# Altium PCB NucciF.PcbDoc (part 1 of 3)
Units mm, origin at the board's own origin, x right, y up, seen from the top; angles counter-clockwise.
Board outline 88.1 x 36.1 mm, 4 copper layers (Top Layer, inner 1, inner 2, Bottom Layer), stack 1.588 mm thick; 144 components, 118 nets, 519 pads, 140 vias.
Unrouted connection lines stored in the file: 6.
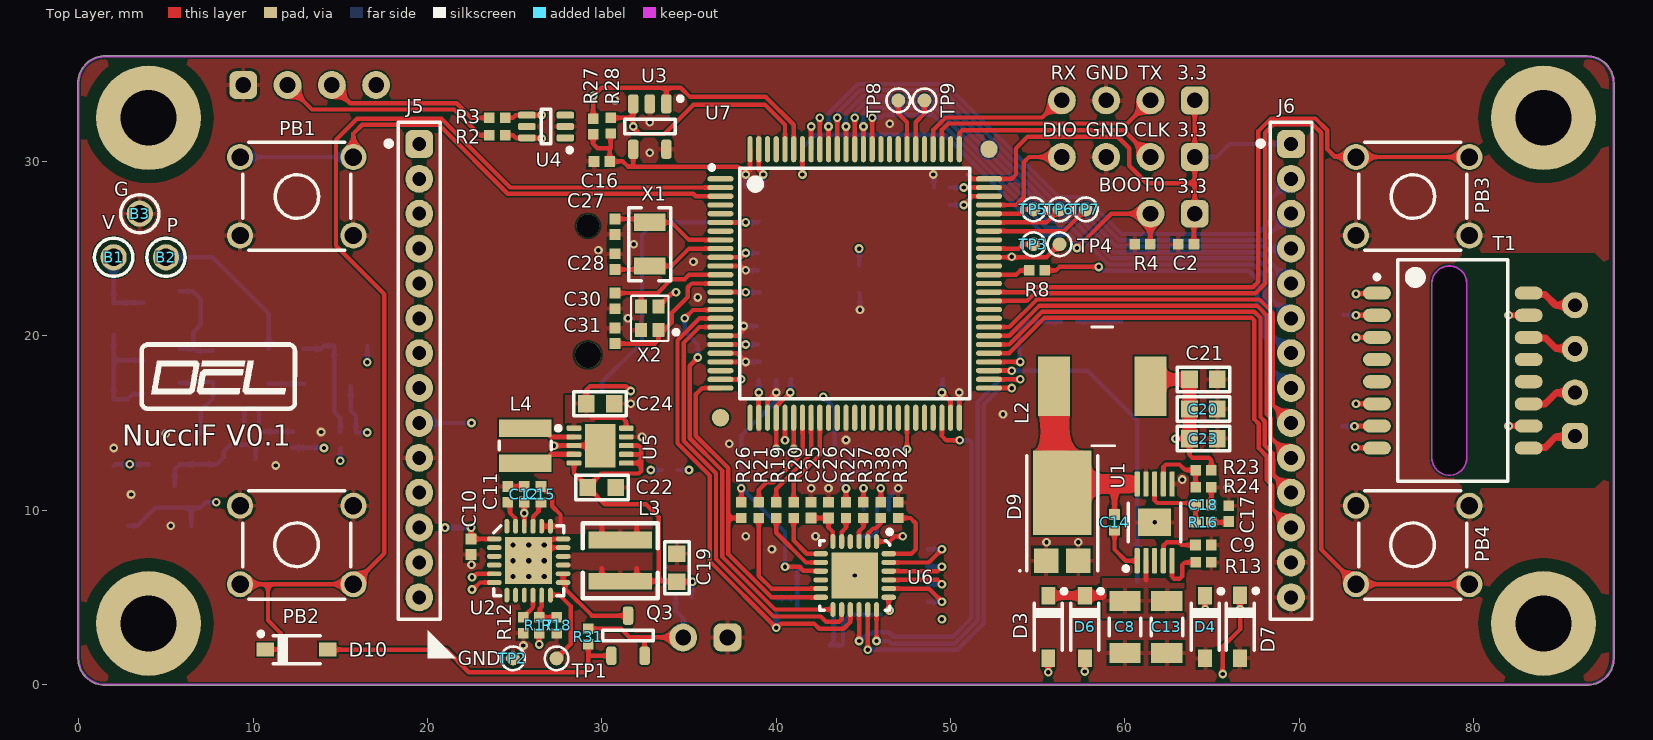
[diagram p0: Top Layer view]
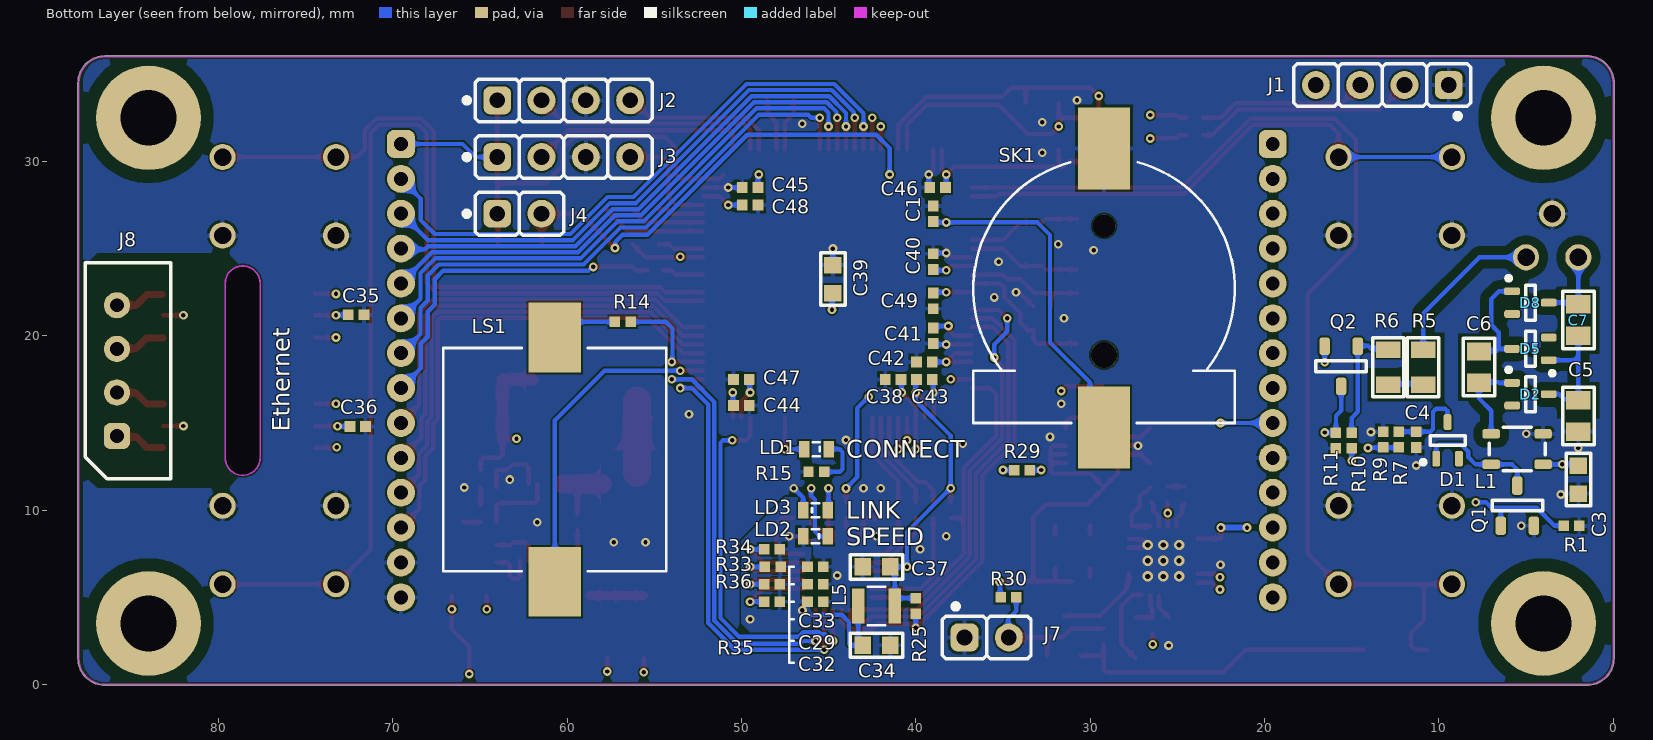
[diagram p1: Bottom Layer view, seen from below]
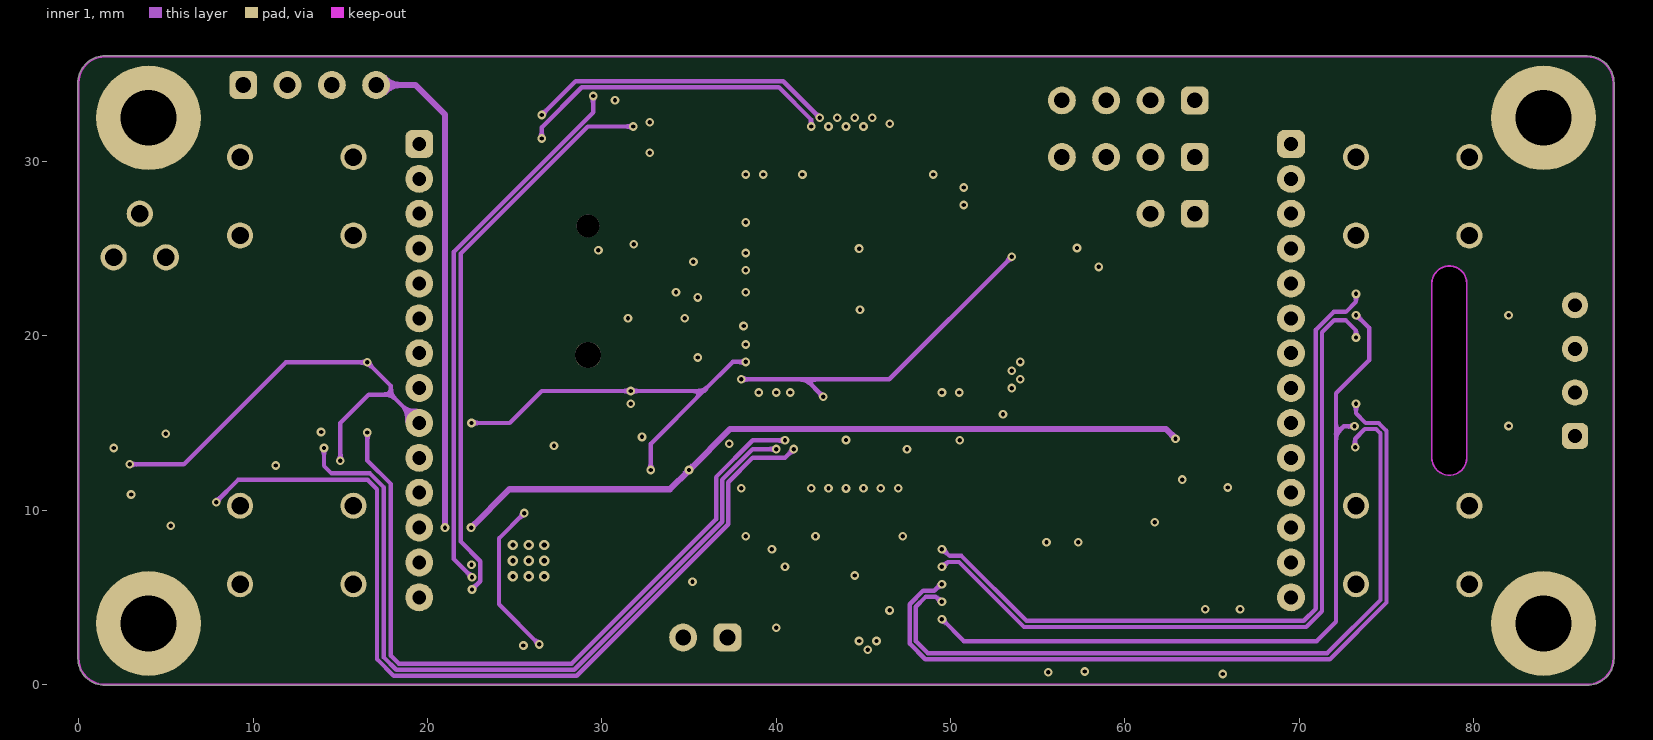
[diagram p2: inner 1]
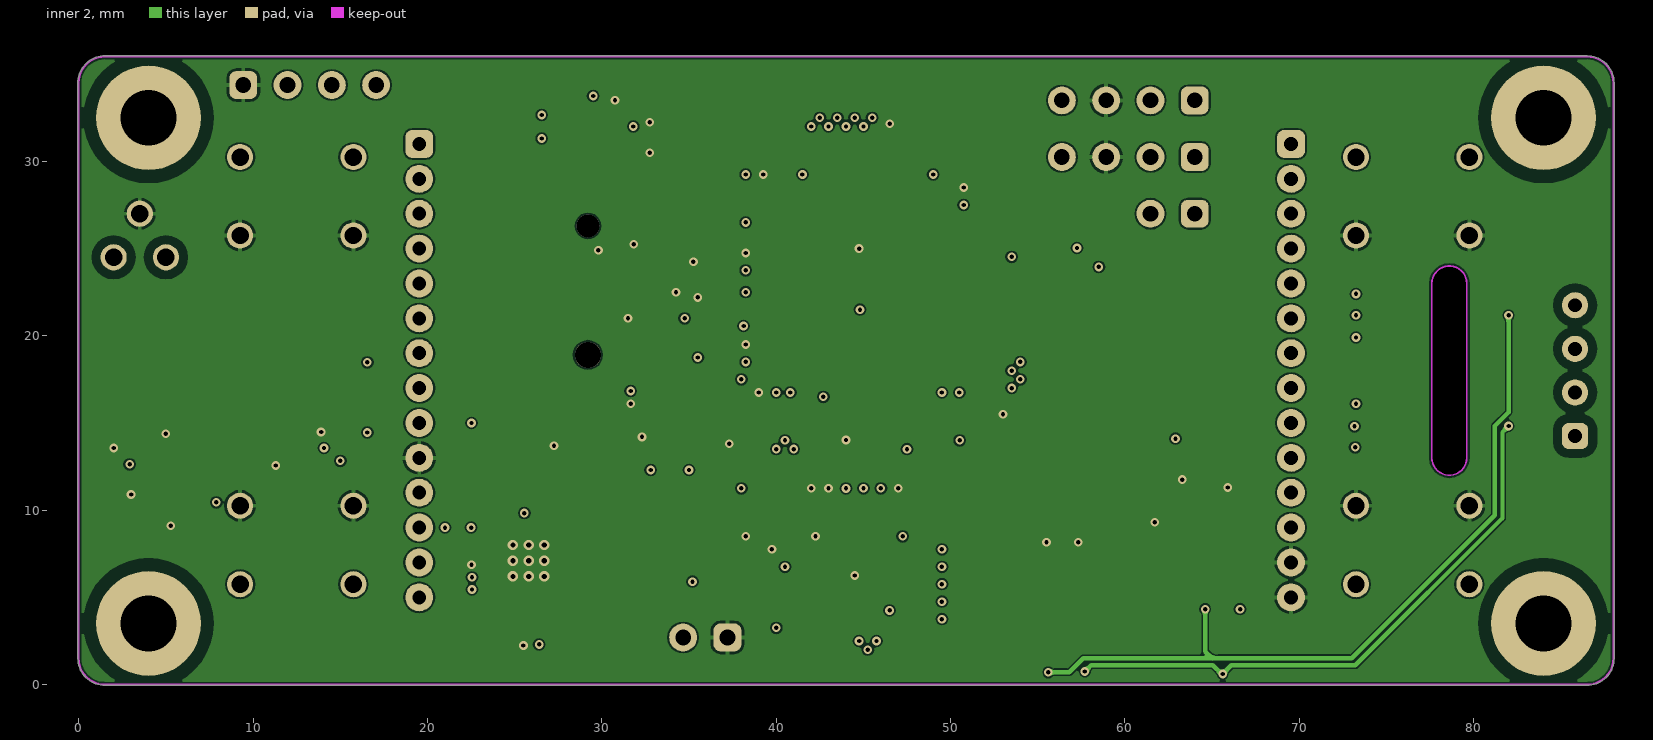
[diagram p3: inner 2]
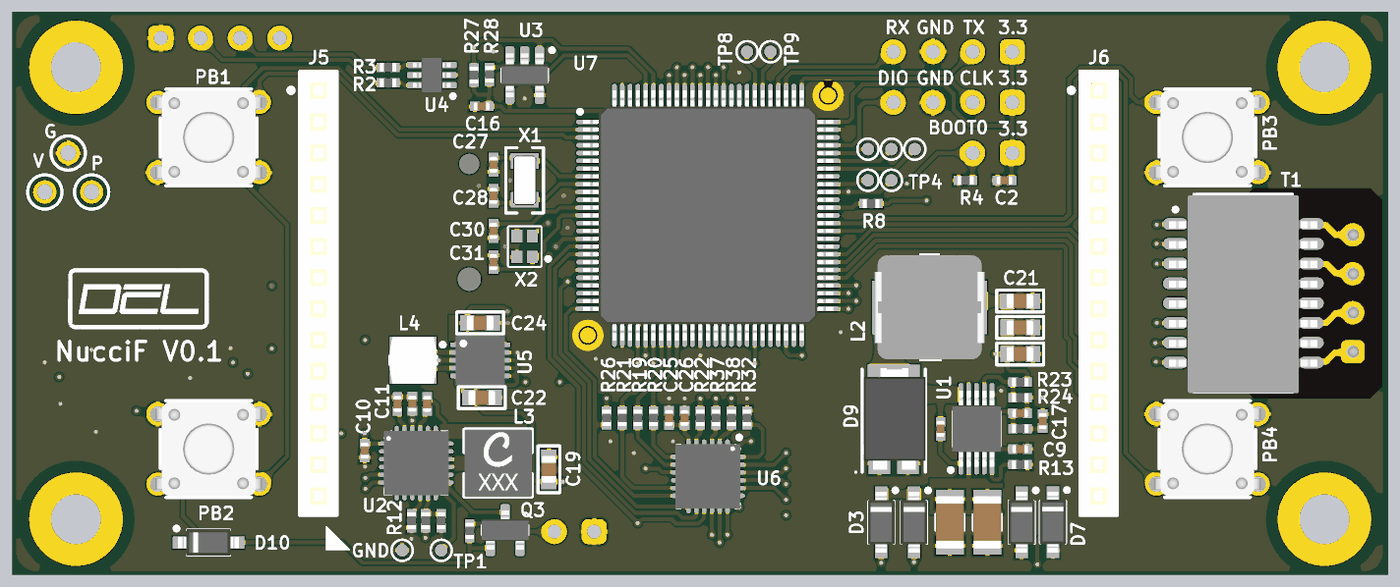
[diagram p5: 3D render of the assembled board from above, using the file's embedded part models]
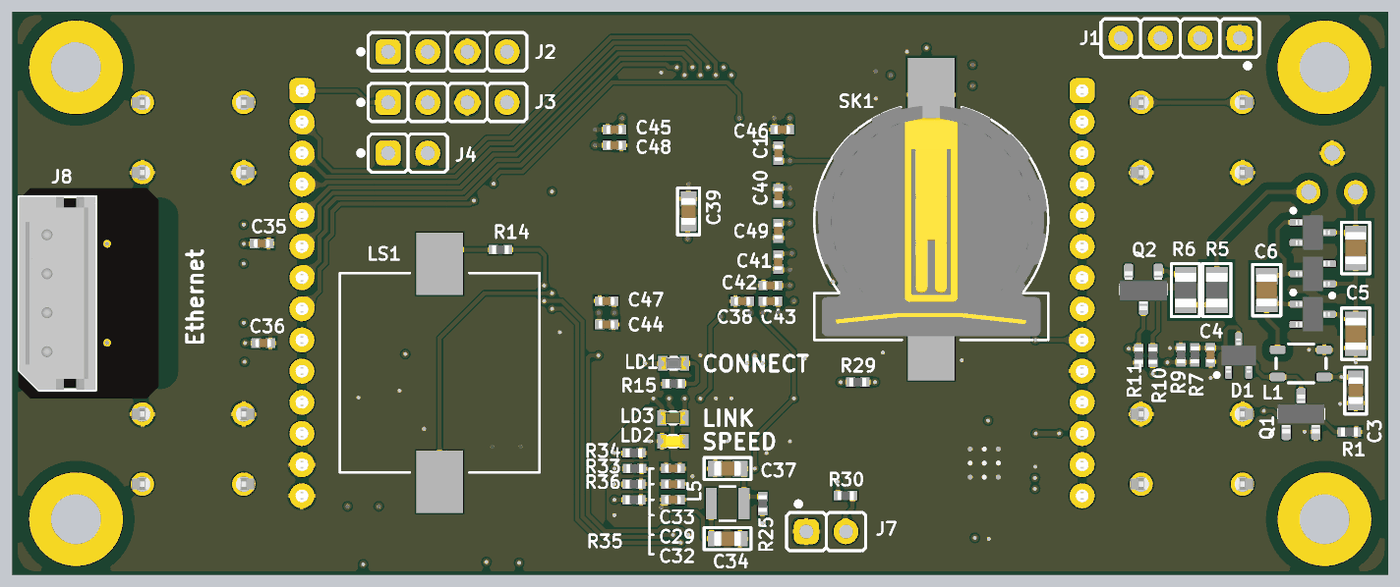
[diagram p6: 3D render of the assembled board from below, using the file's embedded part models]

## Layer stack, top to bottom
Top Solder: solder mask 0.01, Solder Resist, Dk 3.5
Top Layer: signal copper 0.036
Dielectric 2: prepreg 0.2104, 7628, Dk 4.4
inner 1: signal copper 0.0152
Dielectric 1: dielectric 1.065, FR-4, Dk 4.6
inner 2: signal copper 0.0152
Dielectric 3: prepreg 0.2104, 7628, Dk 4.4
Bottom Layer: signal copper 0.036
Bottom Solder: solder mask 0.01, Solder Resist, Dk 3.5

## Board outline
-0.05,1.499 cw(c0.198,1.5) -0.05,1.5 -0.05,34.499 cw(c0.001,34.5) -0.05,34.5 cw(c1.501,34.5) -0.05,34.503 -0.05,34.6 cw(c0,34.6) -0.046,34.621 cw(c1.5,34.5) 1.5,36.05 cw(c1.5,36.022) 1.501,36.05 86.5,36.05 cw(c86.5,34.5) 88.05,34.501 cw(c88.003,34.5) 88.05,34.5 88.05,1.5 cw(c88.037,1.5) 88.05,1.499 ccw(c87.663,1.5) 88.05,1.5 88.05,1.499 cw(c86.5,1.5) 86.5,-0.05 1.5,-0.05 cw(c1.5,1.5)
cut-out: 77.6,13 ccw(c78.6,13) 79.6,13 79.6,23 ccw(c78.6,23) 77.6,23

## Design rules (kind name [scope] priority, off if disabled: settings)
Clearance Clearance_HV [InNetClass('HV')] p1: gap=0.5 ignorepadtopadclearanceinfootprint=FALSE
Clearance Clearance_DIFF100_HV [InNetClass('DIFF100_HV') vs not InNetClass('DIFF100_HV')] p2: gap=0.5 ignorepadtopadclearanceinfootprint=FALSE
Clearance Clearance_MHKeepOut [(ObjectKind = 'Pad') And (AsMM(PadXSize_AllLayers) = 6) vs OnLayer('Keep-Out Layer')] p3: gap=0.2 ignorepadtopadclearanceinfootprint=FALSE except(0: Arc-Hole Track-Hole SMDPad-Hole THPad-Hole Via-Hole Fill-Hole Poly-Hole Region-Hole Text-Hole)
Clearance Clearance_MH [(ObjectKind = 'Pad') And (AsMM(PadXSize_AllLayers) = 6)] p4: gap=0.75 ignorepadtopadclearanceinfootprint=FALSE except(0: Arc-Hole Track-Hole SMDPad-Hole THPad-Hole Via-Hole Fill-Hole Poly-Hole Region-Hole Text-Hole)
Clearance [All] p5: gap=0.1 ignorepadtopadclearanceinfootprint=FALSE
DiffPairsRouting DiffPair_DIFF100DiffPairsRouting [InDifferentialPairClass('DIFF100') or InDifferentialPairClass('DIFF100_HV')] p1: maxlimit=0.3 minlimit=0.2 mostfreqgap=0.25 midlayer1_maxgap=0.2 midlayer1_prefgap=0.2 midlayer1_minwidth=0.158 midlayer1_maxwidth=0.158 midlayer1_prefwidth=0.158 midlayer2_maxgap=0.2 midlayer2_prefgap=0.2 midlayer2_minwidth=0.158 midlayer2_maxwidth=0.158 midlayer2_prefwidth=0.158 impedanceprofiledriven=TRUE impedanceprofileid={F871FC90-6CB0-4843-A030-AEDCB11ECAEF} impedanceprofilevalue=100.000000 maxuncoupledlength=12
Height [All] p1: minheight=0 maxheight=30 prefheight=12.7
HoleSize [All] p1: absolutevalues=TRUE maxlimit=4 minlimit=0.2 maxpercent=80.000 minpercent=20.000
HoleToHoleClearance [All] p1: gap=0.2 allowstackedmicrovias=TRUE
MinimumSolderMaskSliver [All] p1: minsoldermaskwidth=0.1
PolygonConnect [All] p1: thpad.connectstyle=Relief thpad.reliefconductorwidth=0.25 thpad.reliefentries=4 thpad.polygonreliefangle="90 Angle" thpad.airgapwidth=0.15 smdpad.connectstyle=Relief smdpad.reliefconductorwidth=0.25 smdpad.reliefentries=4 smdpad.polygonreliefangle="90 Angle" smdpad.airgapwidth=0.15 via.connectstyle=Direct via.reliefconductorwidth=0.25 via.reliefentries=4 via.polygonreliefangle="90 Angle" via.airgapwidth=0.15
RoutingCorners [All] p1: cornerstyle=45-Degree minsetback=2 maxsetback=2
RoutingVias [All] p1: holewidth=0.5 width=1 viastyle="Through Hole" minholewidth=0.25 minwidth=0.5 maxholewidth=0.5 maxwidth=1
SilkToSilkClearance [All] p1: silktosilkclearance=0
SilkToSolderMaskClearance [IsPad] p1: minsilkscreentomaskgap=0.1 clearancetoexposedcopper=TRUE
SolderMaskExpansion [All] p1: expansion=0.05 istentingtop=FALSE
Width DiffPair_DIFF100Width [InDifferentialPairClass('DIFF100') or InDifferentialPairClass('DIFF100_HV')] p1: maxlimit=0.254 minlimit=0.25 preferedwidth=0.254 toplayer_maxwidth=0.25 toplayer_prefwidth=0.25 midlayer1_minwidth=0.254 midlayer2_minwidth=0.254 bottomlayer_maxwidth=0.25 bottomlayer_prefwidth=0.25 minimp=50.000000 maximp=50.000000 favimp=100.000000
Width [All] p2: maxlimit=3 minlimit=0.2 preferedwidth=0.25
22 further rules are at their usual default settings.

## Classes and differential pairs
net class HV: 400V NetC5_2 NetC6_1 NetC6_2 NetR5_2 PULSE
net class DIFF100: RD_N RD_P TD_N TD_P
net class DIFF100_HV: RX_N RX_P TX_N TX_P
differential pair TD: +TD_P -TD_N
differential pair RD: +RD_P -RD_N
differential pair RX: +RX_P -RX_N
differential pair TX: +TX_P -TX_N

## Components (designator, comment, footprint, x,y, rotation, side; value= is the part's Value field where it differs from the comment)
B1 "V" c150h100 2,24.5 r0 top
B2 "P" c150h100 5,24.5 r0 top
B3 "G" c150h100 3.5,27 r0 top
C1 "100n" CAPC1005X55N 39,27 r270 bottom
C2 "100n" CAPC1005X55N 63.5,25.25 r0 top
C3 "10u" CAPC1608X87N 2,11.75 r90 bottom
C4 "100n" CAPC1005X55N 11.3,14.05 r90 bottom
C5 "22n" CAPC2012X135N 2,15.4 r90 bottom
C6 "22n" CAPC2012X135N 7.7,18.2 r90 bottom
C7 "22n" CAPC2012X135N 2,20.9 r90 bottom
C8 "2.2u" CAPC3216X140N 60,3.3 r270 top
C9 "10n" CAPC1005X55N 64.5,8 r180 top
C10 "4.7u" CAPC1005X55N 22.5,7.9 r90 top
C11 "4.7u" CAPC1005X55N 24.6,10.9 r270 top
C12 "4.7u" CAPC1005X55N 25.55,10.91 r270 top
C13 "2.2u" CAPC3216X140N 62.4,3.3 r270 top
C14 "100n" CAPC1005X55N 59.4,9.3 r90 top
C15 "100n" CAPC1005X55N 26.5,10.9 r90 top
C16 "100n" CAPC1005X55N 30,30 r0 top
C17 "4.7n" CAPC1005X55N 65.95,9.8 r270 top
C18 "33p" CAPC1005X55N 64.5,10.3 r180 top
C19 "10u" CAPC1608X87N 34.3,6.7 r270 top
C20 "10u" CAPC1608X87N 64.5,15.8 r0 top
C21 "10u" CAPC1608X87N 64.5,17.5 r0 top
C22 "10u" CAPC1608X87N 30,11.3 r180 top
C23 "10u" CAPC1608X87N 64.5,14.1 r0 top
C24 "10u" CAPC1608X87N 29.9,16.1 r180 top
C25 "470p" CAPC1005X55N 42,10 r270 top
C26 "2.2u" CAPC1005X55N 43,10 r270 top
C27 "15p" CAPC1005X55N 30.75,26.25 r90 top
C28 "15p" CAPC1005X55N 30.75,24.25 r270 top
C29 "22n" CAPC1005X55N 45.75,5.75 r180 bottom
C30 "6.8p" CAPC1005X55N 30.75,22 r90 top
C31 "6.8p" CAPC1005X55N 30.75,20 r270 top
C32 "100n" CAPC1005X55N 45.75,4.75 r0 bottom
C33 "100n" CAPC1005X55N 45.75,6.75 r0 bottom
C34 "4.7u" CAPC1608X87N 42.25,2.25 r0 bottom
C35 "22n" CAPC1005X55N 72.1,21.2 r180 bottom
C36 "22n" CAPC1005X55N 72,14.8 r180 bottom
C37 "4.7u" CAPC1608X87N 42.25,6.75 r180 bottom
C38 "100n" CAPC1005X55N 41.3,17.5 r180 bottom
C39 "10u" CAPC1608X87N 44.75,23.25 r90 bottom
C40 "100n" CAPC1005X55N 39,24.25 r270 bottom
C41 "100n" CAPC1005X55N 39,20 r90 bottom
C42 "100n" CAPC1005X55N 39.5,18.5 r180 bottom
C43 "100n" CAPC1005X55N 39.5,17.5 r0 bottom
C44 "100n" CAPC1005X55N 50,16 r0 bottom
C45 "100n" CAPC1005X55N 49.5,28.5 r180 bottom
C46 "100n" CAPC1005X55N 38.75,28.5 r180 bottom
C47 "2.2u" CAPC1005X55N 50,17.5 r180 bottom
C48 "2.2u" CAPC1005X55N 49.5,27.5 r0 bottom
C49 "100n" CAPC1005X55N 39,22 r90 bottom
D1 "1SS370" SOT65P210X100-3N 9.5,14 r90 bottom
D2 "1SS370" SOT65P210X100-3N 4.75,16.65 r180 bottom
D3 "MBR0540T1G" SOD3716X135N 55.6,3.3 r270 top
D4 "MBR0540T1G" SOD3716X135N 64.6,3.3 r270 top
D5 "1SS370" SOT65P210X100-3N 4.75,19.25 r0 bottom
D6 "MBR0540T1G" SOD3716X135N 57.7,3.3 r270 top
D7 "MBR0540T1G" SOD3716X135N 66.6,3.318 r270 top
D8 "1SS370" SOT65P210X100-3N 4.75,21.9 r180 bottom
D9 "SBRT15U100SP5" SBRT15U100SP5 56.4,9.823 r90 top
D10 "1N4148W" SOD3715X145N 12.489,2 r0 top
J1 "Header 4" 3M_2304-6111-TG 9.433,34.379 r0 bottom
J2 "Header 4" 3M_2304-6111-TG 64,33.5 r180 bottom
J3 "Header 4" 3M_2304-6111-TG 64,30.25 r180 bottom
J4 "Header 2" 3M_2302-6111-TG 64,27 r180 bottom
J5 "Socket 14" 3M_955114-6102-AR 19.5,18 r270 top
J6 "Socket 14" 3M_955114-6102-AR 69.5,18 r270 top
J7 "Header 2" 3M_2302-6111-TG 37.2,2.7 r180 bottom
J8 "SPOX" MOLEX_22-03-5045 85.879,18 r90 bottom
L1 "ATB322515" XFMR_ATB322515-0110-T000 5.5,13.5 r0 bottom value="Step-up Transformers"
L2 "15uH" IND_VISHAY_IHLP-2525CZ 58.7,17.1 r0 top
L3 "1uH" IND_COILCRAFT_XAL4020 31.05,7.1 r270 top
L4 "2.2uH" VLS3010CX-1 25.6,13.7 r90 top
L5 "2.2uH" INDC2520X100N 42.25,4.5 r180 bottom
LD1 "Blue" LEDC1608X80N_BLUE 45.7,13.5 r0 bottom
LD2 "Yellow" LEDC1608X80N_YELLOW 45.75,8.5 r0 bottom
LD3 "Green" LEDC1608X80N_GREEN 45.75,10 r180 bottom
LS1 "Piezo" HPS13C 60.7,12.9 r180 bottom
PB1 "Push Button" PB_E-SWITCH_TL1105HF100Q 12.5,28 r180 top
PB2 "Push Button" PB_E-SWITCH_TL1105HF100Q 12.5,8 r0 top
PB3 "Push Button" PB_E-SWITCH_TL1105HF100Q 76.5,28 r180 top
PB4 "Push Button" PB_E-SWITCH_TL1105HF100Q 76.5,8 r0 top
Q1 "IRLML0100TRPBF" SOT95P237X112-3N 5.5,10.256 r90 bottom
Q2 "BC857B" SOT95P230X110-3N 15.6,18.25 r270 bottom
Q3 "IRLML6401PBF" SOT95P237X112-3N 31.5,2.8 r90 top
R1 "100k" RESC1005X40N 2.4,9.1 r0 bottom
R2 "100" RESC1005X40N 24,31.5 r0 top
R3 "100" RESC1005X40N 24,32.5 r0 top
R4 "1k" RESC1005X40N 61,25.25 r180 top
R5 "0" RESC2012X60N 10.9,18.2 r270 bottom
R6 "100k" RESC2012X60N 12.9,18.2 r90 bottom
R7 "100k" RESC1005X40N 12.3,14.05 r270 bottom
R8 "100" RESC1005X40N 54.95,23.75 r180 top
R9 "7k5" RESC1005X40N 13.2,14.05 r270 bottom
R10 "1M" RESC1005X40N 15,14 r270 bottom
R11 "12k" RESC1005X40N 15.9,14 r90 bottom
R12 "680" RESC1005X40N 25.5,3.4 r90 top
R13 "270k" RESC1005X40N 64.5,7 r180 top
R14 "270" RESC1005X40N 56.8,20.8 r180 bottom
R15 "1k" RESC1005X40N 45.7,12.2 r0 bottom
R16 "20k" RESC1005X40N 64.5,9.3 r180 top
R17 "100k" RESC1005X40N 26.4,3.4 r270 top
R18 "100k" RESC1005X40N 27.4,3.4 r90 top
R19 "10" RESC1005X40N 40,10 r270 top
R20 "10" RESC1005X40N 41,10 r270 top
R21 "10" RESC1005X40N 39,10 r270 top
R22 "100" RESC1005X40N 44,10 r270 top
R23 "51k" RESC1005X40N 64.5,12.3 r0 top
R24 "10k" RESC1005X40N 64.5,11.3 r180 top
R25 "1k5" RESC1005X40N 40,4.5 r90 bottom
R26 "2k" RESC1005X40N 38,10 r90 top
R27 "2k" RESC1005X40N 29.5,32 r270 top
R28 "2k" RESC1005X40N 30.5,32.05 r270 top
R29 "0" RESC1005X40N 33.9,12.3 r180 bottom
R30 "0" RESC1005X40N 34.686,5.008 r180 bottom
R31 "100k" RESC1005X40N 29.225,2.749 r90 top
R32 "12k" RESC1005X40N 47,10 r90 top
R33 "49R9" RESC1005X40N 48.2,6.75 r180 bottom
R34 "49R9" RESC1005X40N 48.25,7.75 r180 bottom
R35 "49R9" RESC1005X40N 48.25,4.75 r180 bottom
R36 "49R9" RESC1005X40N 48.25,5.75 r180 bottom
R37 "4k7" RESC1005X40N 45,10 r90 top
R38 "270" RESC1005X40N 46,10 r90 top
SK1 "BH500" EEMB_BH500 29.2,23.5 r90 bottom
T1 "LF-H84P-1" XFMR_LF-H84P 78.8,18 r0 top
TP1 "Test Point" TP_SMD_800 27.4,1.5 r90 top
TP2 "GND" TP_SMD_800 24.9,1.5 r90 top
TP3 "Test Point" TP_SMD_800 54.75,25.25 r90 top
TP4 "Test Point" TP_SMD_800 56.25,25.25 r90 top
TP5 "Test Point" TP_SMD_800 54.75,27.25 r90 top
TP6 "Test Point" TP_SMD_800 56.25,27.25 r90 top
TP7 "Test Point" TP_SMD_800 57.75,27.25 r90 top
TP8 "Test Point" TP_SMD_800 47,33.5 r90 top
TP9 "Test Point" TP_SMD_800 48.5,33.5 r90 top
U1 "TPS54260" SOP50P490X110-11N-R157X188 61.7,9.3 r90 top
U2 "RT9466" QFN50P400X400X100-25N-S270 25.8,7.1 r0 top locked
U3 "24AA08" SOT95P280X145-5N 32.75,32 r270 top
U4 "NUP4202" SOT65P220X110-6N 26.8,32 r180 top
U5 "TPS63001" SON50P300X300X100-11N-R175X250 29.9,13.7 r0 top
U6 "LAN8720" QFN50P400X400X100-25N-S265 44.5,6.25 r270 top
U7 "STM32F407VGT6" QFP50P1600X1600X160-100N 44.5,23 r0 top
X1 "32.768KHZ" OSCCC150X320X80-2N 32.75,25.25 r90 top
X2 "24MHZ" OSCCC160X200X65-4N 32.75,21 r180 top

## Footprints (in the part's own frame and the unit in brackets; to place one, negate y for a bottom-side part, rotate by r counter-clockwise, add the part's x,y. Pads: shape width x height; smd on the part's side, far side on the other; paste and mask are expansions set on the pad)
3M_2302-6111-TG [mm] "4 Contacts Straight Strip Header Pitch 2.54mm L=5.8mm ''Mini-Wire-Wrap''"
  rrect50% 1.6x1.6 hole 0.9: 1(0,0)
  round 1.6 hole 0.9: 2(2.54,0)
  silkscreen extent -1.9,-1.23 3.81,1.23
3M_2304-6111-TG [mm] "4 Contacts Straight Strip Header Pitch 2.54mm L=5.8mm ''Mini-Wire-Wrap''"
  rrect50% 1.6x1.6 hole 0.9: 1(0,0)
  round 1.6 hole 0.9: 2(2.54,0) 3(5.08,0) 4(7.62,0)
  silkscreen extent -1.27,-1.23 8.89,1.93
3M_955114-6102-AR [mm] "2 mm Straight, Solder Tail"
  rrect50% 1.6x1.6 hole 0.8: 1(-13,0.025)
  round 1.6 hole 0.8: 2(-11,0.025) 3(-9,0.025) 4(-7,0.025) 5(-5,0.025) 6(-3,0.025) 7(-1,0.025) 8(1,0.025) 9(3,0.025) 10(5,0.025) 11(7,0.025) 12(9,0.025) 13(11,0.025) 14(13,0.025)
  silkscreen extent -14.25,-1.87 14.25,1.23, body extent -14.25,-1.18 14.25,1.23, height 4
c150h100 [mm] "Plated Through Hole: Hole Dia.=1mm Pad Dia.=1.5mm"
  round 1.5 hole 1: 1(0,0)
  silkscreen extent -1.1,-1.1 1.1,1.1
CAPC1005X55N [mm] "Chip Capacitor, Body 1.0x0.55mm, IPC Medium Density"
  rect 0.62x0.62 smd: 1(-0.45,0) 2(0.45,0)
  body extent -0.52,-0.27 0.53,0.28, height 0.55
CAPC1608X87N [mm] "Chip Capacitor, Body 1.6x0.8mm IPC Medium Density"
  rect 0.95x1 smd: 1(-0.8,0) 2(0.8,0)
  silkscreen extent -1.5,-0.7 1.5,0.7, body extent -0.87,-0.47 0.88,0.48, height 0.87
CAPC2012X135N [mm] "Chip Capacitor, Body 2.0x1.25mm, IPC Medium Density"
  rect 1.05x1.4 smd: 1(-0.9,0) 2(0.9,0)
  silkscreen extent -1.65,-0.9 1.65,0.9, body extent -1.05,-0.67 1.05,0.68, height 1.25
CAPC3216X140N [mm] "Chip Capacitor, Body 3.2x1.6mm, IPC Medium Density"
  rect 1.15x1.8 smd: 1(-1.5,0) 2(1.5,0)
  silkscreen extent -0.5,-0.9 0.5,0.9, body extent -1.7,-0.9 1.7,0.9, height 1.4
EEMB_BH500 [mm] "Battery holder for coin-type Lithium Battery  BH500(ForLIR/CR1216,1220,1225)"
  rect 4.7x3 smd: 1(-8.75,0) 2(7.25,0)
  round 1.3 hole 1.3 unplated: MH1(2.8,0)
  round 1.5 hole 1.5 unplated: MH2(-4.6,0)
  silkscreen extent -8.5,-7.5 6.44,7.5, body extent -10.9,-7.43 9.3,7.43, height 4
HPS13C [mm] "12.8 x 12.8 mm PIEZO SOUND GENERATORS"
  rect 3x4 smd: 1(0,-7) 2(0,7)
  silkscreen extent -6.4,-6.4 6.4,6.4, body extent -6.4,-8.4 6.4,8.4, height 2.5
IND_COILCRAFT_XAL4020 [mil] "Coilcraft High Temperature Shielded Power Inductors"
  rect 38x144 smd: 1(-46.5,0) 2(46.5,0)
  silkscreen extent -85,-85 85,85, body extent -85,-85 85,85, height 83
IND_VISHAY_IHLP-2525CZ [mm] "6.47 x 6.86 x 3 mm"
  rect 1.83x3.43 smd: 1(-2.77,0) 2(2.77,0)
  silkscreen extent -0.6,-3.4 0.7,3.4, body extent -3.54,-3.34 3.54,3.34, height 2.89
INDC2520X100N [mm] "Chip Inductor, EIA 1008, Metric 2520, 2.50mm L X 2mm W, IPC Medium Density"
  rect 0.7x2 smd: 1(-1.05,0) 2(1.05,0)
  silkscreen extent -0.5,-1.1 0.5,1.1, body extent -1.33,-1.07 1.33,1.07, height 1
LEDC1608X80N_BLUE [mm] "Chip BLUE LED, 2-Leads, Body 1.6x0.8mm, IPC Medium Density"
  rect 0.6x0.95 smd: 1(-0.7,0) 2(0.7,0)
  silkscreen extent -0.2,-0.4 0.2,0.4, body extent -0.8,-0.4 0.8,0.4, height 0.6
LEDC1608X80N_GREEN [mm] "Chip GREEN LED, 2-Leads, Body 1.6x0.8mm, IPC Medium Density"
  rect 0.6x0.95 smd: 1(-0.7,0) 2(0.7,0)
  silkscreen extent -0.2,-0.4 0.2,0.4, body extent -0.8,-0.4 0.8,0.4, height 0.6
LEDC1608X80N_YELLOW [mm] "Chip YELLOW LED, 2-Leads, Body 1.6x0.8mm, IPC Medium Density"
  rect 0.6x0.95 smd: 1(-0.7,0) 2(0.7,0)
  silkscreen extent -0.2,-0.4 0.2,0.4, body extent -0.8,-0.4 0.8,0.4, height 0.6
MOLEX_22-03-5045 [mm] "4.9 x 12.4 x 5.9, 2.50mm Pitch SPOX Wire-to-Board Header, Vertical, Shrouded, 4 Circuits, Tin (Sn) Plating"
  rrect50% 1.5x1.5 hole 0.8: 1(-3.75,-0.065)
  round 1.5 hole 0.8: 2(-1.25,-0.065) 3(1.25,-0.065) 4(3.75,-0.065)
  silkscreen extent -6.2,-3.15 6.2,1.75, body extent -6.2,-3.12 6.2,1.78, height 5.95
OSCCC150X320X80-2N [mm] "Oscillator, corner concave; 2 pin, 3.20mm L X 1.50mm W X 0.80mm H, IPC Medium Density"
  rect 1x1.8 smd: 1(-1.25,0) 2(1.25,0)
  silkscreen extent -2.1,-1.2 2.1,1.2, body extent -1.6,-0.75 1.6,0.75, height 0.71
OSCCC160X200X65-4N [mm] "Oscillator, corner concave; 4 pin, 2.00mm L X 1.60mm W X 0.65mm H, IPC Medium Density"
  rect 0.7x0.8 smd: 1(-0.5,0.675) 2(-0.5,-0.675) 3(0.5,-0.675) 4(0.5,0.675)
  silkscreen extent -1.63,-1.3 1.07,1.3, body extent -0.8,-1 0.8,1, height 0.65
PB_E-SWITCH_TL1105HF100Q [mm] "6x6mm Model, Horizontal, Flat Plunger Type (without Ground Terminal) Pushbutton Switch, OMRON B3F Series"
  round 1.5 hole 1: 1(-3.25,2.25) 2(3.25,2.25) 3(-3.25,-2.25) 4(3.25,-2.25)
  silkscreen extent -3.1,-3.1 3.1,3.1, body extent -3.95,-3 3.95,3, height 12.51
QFN50P400X400X100-25N-S265 [mm] "QFN,0.50mm pitch,square;6 pin X 6 pin,4.0mm X 4.0mm X 1.00mm H body (w/thermal tab 2.65 X 2.65mm),  IPC Medium Density"
  oval 0.85x0.3 smd: 1(-1.95,1.25) 2(-1.95,0.75) 3(-1.95,0.25) 4(-1.95,-0.25) 5(-1.95,-0.75) 6(-1.95,-1.25) 13(1.95,-1.25) 14(1.95,-0.75) 15(1.95,-0.25) 16(1.95,0.25) 17(1.95,0.75) 18(1.95,1.25)
  oval 0.3x0.85 smd: 7(-1.25,-1.95) 8(-0.75,-1.95) 9(-0.25,-1.95) 10(0.25,-1.95) 11(0.75,-1.95) 12(1.25,-1.95) 19(1.25,1.95) 20(0.75,1.95) 21(0.25,1.95) 22(-0.25,1.95) 23(-0.75,1.95) 24(-1.25,1.95)
  rect 2.65x2.65 smd: 25(0,0)
  silkscreen extent -2.62,-2 2,2.13, body extent -2.07,-2.07 2.08,2.08, height 1
QFN50P400X400X100-25N-S270 [mm] "QFN,0.50mm pitch,square;6 pin X 6 pin,4.0mm X 4.0mm X 1.00mm H body (w/thermal tab 2.7 X 2.7mm),  IPC Medium Density"
  oval 0.85x0.28 smd: 1(-1.975,1.25) 2(-1.975,0.75) 3(-1.975,0.25) 4(-1.975,-0.25) 5(-1.975,-0.75) 6(-1.975,-1.25) 13(1.975,-1.25) 14(1.975,-0.75) 15(1.975,-0.25) 16(1.975,0.25) 17(1.975,0.75) 18(1.975,1.25)
  oval 0.28x0.85 smd: 7(-1.25,-1.975) 8(-0.75,-1.975) 9(-0.25,-1.975) 10(0.25,-1.975) 11(0.75,-1.975) 12(1.25,-1.975) 19(1.25,1.975) 20(0.75,1.975) 21(0.25,1.975) 22(-0.25,1.975) 23(-0.75,1.975) 24(-1.25,1.975)
  rect 2.7x2.7 smd paste-3: 25(0,0)
  silkscreen extent -2,-2 2,2, body extent -2.07,-2.07 2.08,2.08, height 1
QFP50P1600X1600X160-100N [mm] "QFP, 0.50mm Pitch, Square; 100 Pin,14.00mm L X 14.00mm W X 1.60mm H Body, IPC Medium Density"
  oval 1.5x0.3 smd: 1(-7.7,6) 2(-7.7,5.5) 3(-7.7,5) 4(-7.7,4.5) 5(-7.7,4) 6(-7.7,3.5) 7(-7.7,3) 8(-7.7,2.5) 9(-7.7,2) 10(-7.7,1.5) 11(-7.7,1) 12(-7.7,0.5) 13(-7.7,0) 14(-7.7,-0.5) 15(-7.7,-1) 16(-7.7,-1.5) 17(-7.7,-2) 18(-7.7,-2.5) 19(-7.7,-3) 20(-7.7,-3.5) 21(-7.7,-4) 22(-7.7,-4.5) 23(-7.7,-5) 24(-7.7,-5.5) 25(-7.7,-6) 51(7.7,-6) 52(7.7,-5.5) 53(7.7,-5) 54(7.7,-4.5) 55(7.7,-4) 56(7.7,-3.5) 57(7.7,-3) 58(7.7,-2.5) 59(7.7,-2) 60(7.7,-1.5) 61(7.7,-1) 62(7.7,-0.5) 63(7.7,0) 64(7.7,0.5) 65(7.7,1) 66(7.7,1.5) 67(7.7,2) 68(7.7,2.5) 69(7.7,3) 70(7.7,3.5) 71(7.7,4) 72(7.7,4.5) 73(7.7,5) 74(7.7,5.5) 75(7.7,6)
  oval 0.3x1.5 smd: 26(-6,-7.7) 27(-5.5,-7.7) 28(-5,-7.7) 29(-4.5,-7.7) 30(-4,-7.7) 31(-3.5,-7.7) 32(-3,-7.7) 33(-2.5,-7.7) 34(-2,-7.7) 35(-1.5,-7.7) 36(-1,-7.7) 37(-0.5,-7.7) 38(0,-7.7) 39(0.5,-7.7) 40(1,-7.7) 41(1.5,-7.7) 42(2,-7.7) 43(2.5,-7.7) 44(3,-7.7) 45(3.5,-7.7) 46(4,-7.7) 47(4.5,-7.7) 48(5,-7.7) 49(5.5,-7.7) 50(6,-7.7) 76(6,7.7) 77(5.5,7.7) 78(5,7.7) 79(4.5,7.7) 80(4,7.7) 81(3.5,7.7) 82(3,7.7) 83(2.5,7.7) 84(2,7.7) 85(1.5,7.7) 86(1,7.7) 87(0.5,7.7) 88(0,7.7) 89(-0.5,7.7) 90(-1,7.7) 91(-1.5,7.7) 92(-2,7.7) 93(-2.5,7.7) 94(-3,7.7) 95(-3.5,7.7) 96(-4,7.7) 97(-4.5,7.7) 98(-5,7.7) 99(-5.5,7.7) 100(-6,7.7)
  round 1 smd paste-0.51 mask+0.5: FTG1(-7.7,-7.7) FTG2(7.7,7.7)
  silkscreen extent -8.32,-6.6 6.6,6.77, body extent -8.02,-8.02 8.02,8.02, height 1.6
RESC1005X40N [mm] "Chip Resistor, EIA 0402, Metric 1005, Body 1.0x0.5mm, IPC Medium Density"
  rect 0.6x0.6 smd: 1(-0.45,0) 2(0.45,0)
  body extent -0.52,-0.27 0.53,0.28, height 0.4
RESC2012X60N [mm] "Chip Resistor, EIA 0805, Metric 2012, Body 2.0x1.2mm, IPC Medium Density"
  rect 0.95x1.4 smd: 1(-1,0) 2(1,0)
  silkscreen extent -1.7,-0.9 1.7,0.9, body extent -1.1,-0.67 1.1,0.68, height 0.6
SBRT15U100SP5 [mm] "DFN, 3-Leads, Body 4.05x6.6mm"
  rect 1.4x1.39 smd: 1(-2.727,0.92) 2(-2.727,-0.92)
  rect 4.86x3.36 smd: 3(1.177,0)
  silkscreen extent -3.35,-2.02 3.3,2.47, body extent -3.14,-2.03 3.37,1.94, height 1.15
SOD3715X145N [mm] "SOD Diode (SOD-123); 2.70mm W X 1.55mm L X 1.45mm H body, IPC Medium Density"
  rect 1x0.8 smd: 1(-1.8,0) 2(1.8,0)
  silkscreen extent -2.17,-0.8 1.35,1.02, body extent -1.95,-0.85 1.95,0.85, height 1.45
SOD3716X135N [mm] "SOD Diode (SOD-123), 2.70mm W X 1.60mm L X 1.35mm H body, IPC Medium Density"
  rect 1x0.8 smd: 1(-1.8,0) 2(1.8,0)
  silkscreen extent -2.17,-0.8 1.35,1.03, body extent -1.95,-0.85 1.95,0.85, height 1.35
SON50P300X300X100-11N-R175X250 [mm] "SON, 0.50mm Pitch, 10-pin, 3.00mm W  X 3.00mm L X 1.00mm Height, (w/thermal tab 1.75 X 2.50 mm), IPC Medium Density"
  rrect50% 0.85x0.3 smd: 1(-1.5,1) 2(-1.5,0.5) 3(-1.5,0) 4(-1.5,-0.5) 5(-1.5,-1) 6(1.5,-1) 7(1.5,-0.5) 8(1.5,0) 9(1.5,0.5) 10(1.5,1)
  rect 1.75x2.5 smd: 11(0,0)
  silkscreen extent -2.52,0.88 -2.27,1.12, body extent -1.57,-1.57 1.58,1.58, height 1
SOP50P490X110-11N-R157X188 [mm] "SOP, 0.50mm, pitch; 10 pin, 3.00mm W X 3.00mm L X 1.10mm H body (w/thermal tab  1.57 X 1.88 mm), IPC Medium Density"
  rrect50% 1.45x0.3 smd: 1(-2.2,1) 2(-2.2,0.5) 3(-2.2,0) 4(-2.2,-0.5) 5(-2.2,-1) 6(2.2,-1) 7(2.2,-0.5) 8(2.2,0) 9(2.2,0.5) 10(2.2,1)
  rect 1.57x1.88 smd: 11(0,0)
  silkscreen extent -2.77,-1.5 1.1,1.77, body extent -2.45,-1.55 2.45,1.55, height 1.1
SOT65P210X100-3N [mm] "SOT323, 0.65mm pitch; 3 pin, 1.25mm W X 2.00mm L, IPC Medium Density"
  rrect50% 0.9x0.45 smd: 1(-1.05,0.65) 2(-1.05,-0.65) 3(1.05,0)
  silkscreen extent -1.37,-1 0.28,1.53, body extent -1.1,-1.1 1.1,1.1, height 1
SOT65P220X110-6N [mm] "SOT363, 0.65mm pitch; 6 pin, 1.25mm W X 2mm L, IPC Medium Density"
  rrect50% 1x0.4 smd: 1(-1.1,0.65) 2(-1.1,0) 3(-1.1,-0.65) 4(1.1,-0.65) 5(1.1,0) 6(1.1,0.65)
  silkscreen extent -1.48,-1 0.28,1.47, body extent -1.2,-1.1 1.2,1.1, height 1.1
SOT95P230X110-3N [mm] "SOT23, 3 pin, Pitch 0.95mm - 1.3mm W X 2.9mm L X 1.1mm H, IPC Medium Density"
  rrect50% 1x0.6 smd: 1(-1.15,0.95) 2(-1.15,-0.95) 3(1.15,0)
  silkscreen extent -0.33,-1.45 0.33,1.45, body extent -1.17,-1.5 1.33,1.5, height 1.1
SOT95P237X112-3N [mm] "SOT, 0.95mm, pitch; 3 pin,1.30mm W X 2.92mm L X 1.12mm H body, IPC Medium Density"
  rrect50% 1.05x0.6 smd: 1(-1.15,0.95) 2(-1.15,-0.95) 3(1.15,0)
  silkscreen extent -0.3,-1.45 0.3,1.45, body extent -1.25,-1.5 1.25,1.5, height 1.1
SOT95P280X145-5N [mm] "SOT, 0.95mm pitch; 5 pin, 1.60mm W X 2.90mm L X 1.45mm H body, IPC Medium Density"
  rrect50% 1.1x0.6 smd: 1(-1.3,0.95) 2(-1.3,0) 3(-1.3,-0.95) 4(1.3,-0.95) 5(1.3,0.95)
  silkscreen extent -1.72,-1.45 0.43,1.88, body extent -1.4,-1.5 1.4,1.5, height 1.45
TP_SMD_800 [mm]
  round 0.8 smd: 1(0,0)
  silkscreen extent -0.68,-0.68 0.68,0.68
VLS3010CX-1 [mm] "Inductors for power circuits. 3mm x 3mm"
  rect 1x3 smd: 1(-1,0) 2(1,0)
  silkscreen extent -0.25,-1.5 0.25,1.5, body extent -1.5,-1.51 1.5,1.51, height 0.99
XFMR_ATB322515-0110-T000 [mm] "Step-up Transformers"
  rrect50% 1x0.55 smd: 1(-1.475,0.875) 2(-1.475,-0.875) 3(1.5,-0.875) 4(1.5,0.875)
  silkscreen extent -1.6,-1.25 1.6,1.25, body extent -1.6,-1.25 1.6,1.25, height 1.55
XFMR_LF-H84P [mm] "16-Leads, Body 12,70x7,11mm, Pitch 1,27mm, IPC Medium Density"
  oval 1.6x0.75 smd: 1(-4.35,4.445) 2(-4.35,3.175) 3(-4.35,1.905) 4(-4.35,0.635) 5(-4.35,-0.635) 6(-4.35,-1.905) 7(-4.35,-3.175) 8(-4.35,-4.445) 9(4.35,-4.445) 10(4.35,-3.175) 11(4.35,-1.905) 12(4.35,-0.635) 13(4.35,0.635) 14(4.35,1.905) 15(4.35,3.175) 16(4.35,4.445)
  silkscreen extent -4.47,-6.35 3.15,6.35, body extent -4.76,-6.4 4.75,6.3, height 2.14

## Part data
B1 B2 B3: library part PLATED_HOLE1.0_PAD1.5, "Single Terminal Socket", Author="CERN DEM JLC", Component Type="Standard (No BOM)", ComponentHeight=0mm, CreateDate=10/30/2008, Family="Plated Hole", LatestRevisionDate=10/30/2008, Mounted=No, PackageDescription="Plated Through Hole: Hole Dia.=1mm Pad Dia.=1.5mm", Part Description="Plated Through Hole: Hole Dia.=1.0mm Pad Dia.=1.5mm", Part Number=PLATED_HOLE1.0_PAD1.5, Pin Count=1, SMD=No, Socket=No, Status=None
C1 C2 C4 C16 C32 C33 C38 C40 C41 C42 C43 C44 C45 C46 C49: library part CC0402_100NF_50V_10%_X7R, "Non-polarised capacitor", Case=0402, Manufacturer=GENERIC, Manufacturer1 ComponentHeight=0.55mm, Manufacturer1 Example=HITANO, Manufacturer1 Part Number=C0402B104K500NU, Tolerance=±10%, Voltage=50V, Author=DEL, Component Type=Standard, CreateDate=13.11.2017, LatestRevisionDate=13.11.2017, Manufacturer Part Number=CC0402_100NF_50V_10%_X7R, Mounted=Yes, Part Description="SMD Multilayer Chip Ceramic Capacitor", Part Number=CC0402_100NF_50V_10%_X7R, Pin Count=2, SMD=Yes, Socket=No, Status="Not Recommended", TC=X7R
C3 C19 C20 C21 C22 C23 C24 C39: library part CC0603_10UF_10V_20%_X5R, "Non-polarised capacitor", Case=0603, Manufacturer=GENERIC, Manufacturer1 ComponentHeight=0.95mm, Manufacturer1 Example=KEMET, Manufacturer1 Part Number=C0603C106M9PAC, Manufacturer Part Number=CC0603_10uF_10V_20%_X5R, Tolerance=±20%, Voltage=10V, Author="CERN DEM JLC", Component Type=Standard, CreateDate=12/3/2007, HelpURL=\\cern.ch\dfs\Applications\Altium\Datasheets\CC0603_X5R_KEMET.pdf, LatestRevisionDate=12/3/2007, Mounted=Yes, Part Description="SMD Multilayer Chip Ceramic Capacitor", Part Number=CC0603_10UF_10V_20%_X5R, Pin Count=2, SMD=Yes, Socket=No, Status=Preferred, TC=X5R
C5 C6 C7: library part CC0805_22NF_500V_10%_X7R, "Non-polarised capacitor", Case=0805, Manufacturer=GENERIC, Manufacturer1 ComponentHeight=1.35mm, Manufacturer1 Example=KEMET, Manufacturer1 Part Number=C0805C223KCRACTU, Tolerance=±10%, Voltage=500V, Author=DEL, Component Type=Standard, CreateDate=9/2/2025, LatestRevisionDate=9/2/2025, Manufacturer Part Number=CC0805_22NF_500V_10%_X7R, Mounted=Yes, Part Description="SMD Multilayer Chip Ceramic Capacitor", Part Number=CC0805_22NF_500V_10%_X7R, Pin Count=2, SMD=Yes, Socket=No, Status=Preferred, TC=X7R
C8 C13: library part CC1206_2.2UF_100V_10%_X7R, "Non-polarised capacitor", Case=1206, Manufacturer=GENERIC, Manufacturer1 ComponentHeight=1.75mm, Manufacturer1 Example=SAMSUNG, Manufacturer1 Part Number=C1206C225K4RAC, Tolerance=±10%, Voltage=100V, Author=DEL, Component Type=Standard, CreateDate=6/15/2025, LatestRevisionDate=6/15/2025, Manufacturer Part Number=CC1206_2.2UF_100V_10%_X7R, Mounted=Yes, Part Description="SMD Multilayer Chip Ceramic Capacitor", Part Number=CC1206_2.2UF_100V_10%_X7R, Pin Count=2, SMD=Yes, Socket=No, Status=Preferred, TC=X7R
C9: library part CC0402_10NF_16V_10%_X7R, "Non-polarised capacitor", Case=0402, Manufacturer=GENERIC, Manufacturer1 ComponentHeight=0.55mm, Manufacturer1 Example=PHYCOMP, Manufacturer1 Part Number=223878715636, Tolerance=±10%, Voltage=16V, Author="CERN DEM JLC", Component Type=Standard, CreateDate=12/3/2007, HelpURL=\\cern.ch\dfs\Applications\Altium\Datasheets\CC0402_X7R_PHYCOMP.pdf, LatestRevisionDate=12/3/2007, Manufacturer Part Number=CC0402_10NF_16V_10%_X7R, Mounted=Yes, Part Description="SMD Multilayer Chip Ceramic Capacitor", Part Number=CC0402_10NF_16V_10%_X7R, Pin Count=2, SMD=Yes, Socket=No, Status="Not Recommended", TC=X7R
C10 C11 C12: library part CC0402_4.7UF_10V_20%_X5R, "Non-polarised capacitor", Case=0402, Manufacturer=GENERIC, Manufacturer1 ComponentHeight=0.55mm, Tolerance=±20%, Voltage=10V, Author=DEL, Component Type=Standard, CreateDate=1/19/2025, LatestRevisionDate=1/19/2025, Manufacturer Part Number=CC0402_4.7UF_10V_20%_X5R, Mounted=Yes, Part Description="SMD Multilayer Chip Ceramic Capacitor", Part Number=CC0402_4.7UF_10V_20%_X5R, Pin Count=2, SMD=Yes, Socket=No, Status=Preferred, TC=X5R
C14 C15: library part CC0402_100NF_16V_10%_X7R, "Non-polarised capacitor", Case=0402, Manufacturer=GENERIC, Manufacturer1 ComponentHeight=0.55mm, Manufacturer1 Example=PHYCOMP, Manufacturer1 Part Number=223878715649, Tolerance=±10%, Voltage=16V, Author="CERN DEM JLC", Component Type=Standard, CreateDate=12/3/2007, HelpURL=\\cern.ch\dfs\Applications\Altium\Datasheets\CC0402_X7R_PHYCOMP.pdf, LatestRevisionDate=12/3/2007, Manufacturer Part Number=CC0402_100NF_16V_10%_X7R, Mounted=Yes, Part Description="SMD Multilayer Chip Ceramic Capacitor", Part Number=CC0402_100NF_16V_10%_X7R, Pin Count=2, SMD=Yes, Socket=No, Status="Not Recommended", TC=X7R
C17: library part CC0402_4.7NF_16V_10%_X7R, "Non-polarised capacitor", Case=0402, Manufacturer=GENERIC, Manufacturer1 ComponentHeight=0.55mm, Manufacturer1 Example=PHYCOMP, Manufacturer1 Part Number=223878715632, Tolerance=±10%, Voltage=16V, Author="CERN DEM JLC", Component Type=Standard, CreateDate=12/3/2007, HelpURL=\\cern.ch\dfs\Applications\Altium\Datasheets\CC0402_X7R_PHYCOMP.pdf, LatestRevisionDate=12/3/2007, Manufacturer Part Number=CC0402_4.7NF_16V_10%_X7R, Mounted=Yes, Part Description="SMD Multilayer Chip Ceramic Capacitor", Part Number=CC0402_4.7NF_16V_10%_X7R, Pin Count=2, SMD=Yes, Socket=No, Status="Not Recommended", TC=X7R
C18: library part CC0402_33PF_50V_5%_NP0, "Non-polarised capacitor", Case=0402, Manufacturer=GENERIC, Manufacturer1 ComponentHeight=0.55mm, Manufacturer1 Example=PHYCOMP, Manufacturer1 Part Number=223886915339, Tolerance=±5%, Voltage=50V, Author="CERN DEM JLC", Component Type=Standard, CreateDate=12/3/2007, HelpURL=\\cern.ch\dfs\Applications\Altium\Datasheets\CC0402_NP0_PHYCOMP.pdf, LatestRevisionDate=12/3/2007, Manufacturer Part Number=CC0402_33PF_50V_5%_NP0, Mounted=Yes, Part Description="SMD Multilayer Chip Ceramic Capacitor", Part Number=CC0402_33PF_50V_5%_NP0, Pin Count=2, SMD=Yes, Socket=No, Status="Not Recommended", TC=NP0
C25: library part CC0402_470PF_50V_10%_X7R, "Non-polarised capacitor", Case=0402, Manufacturer=GENERIC, Manufacturer1 ComponentHeight=0.55mm, Manufacturer1 Example=PHYCOMP, Manufacturer1 Part Number=223858715618, Tolerance=±10%, Voltage=50V, Author="CERN DEM JLC", Component Type=Standard, CreateDate=03.12.2007, HelpURL=\\cern.ch\dfs\Applications\Altium\Datasheets\CC0402_NP0_PHYCOMP.pdf, LatestRevisionDate=03.12.2007, Manufacturer Part Number=CC0402_470PF_50V_10%_X7R, Mounted=Yes, Part Description="SMD Multilayer Chip Ceramic Capacitor", Part Number=CC0402_470PF_50V_10%_X7R, Pin Count=2, SMD=Yes, Socket=No, Status="Not Recommended", TC=X7R
C26 C47 C48: library part CC0402_2.2UF_6.3V_20%_X5R, "Non-polarised capacitor", Case=0402, Manufacturer=GENERIC, Manufacturer1 ComponentHeight=0.55mm, Tolerance=±20%, Voltage=6.3V, Author=ELMAN, Component Type=Standard, CreateDate=19.05.2015, HelpURL=\\cern.ch\dfs\Applications\Altium\Datasheets\CC0402_X5R_KEMET.pdf, LatestRevisionDate=19.05.2015, Manufacturer Part Number=CC0402_2.2UF_6.3V_20%_X5R, Mounted=Yes, Part Description="SMD Multilayer Chip Ceramic Capacitor", Part Number=CC0402_2.2UF_6.3V_20%_X5R, Pin Count=2, SMD=Yes, Socket=No, Status=Preferred, TC=X5R
C27 C28: library part CC0402_15PF_50V_5%_NP0, "Non-polarised capacitor", Case=0402, Manufacturer=GENERIC, Manufacturer1 ComponentHeight=0.55mm, Manufacturer1 Example=PHYCOMP, Manufacturer1 Part Number=223886915159, Tolerance=±5%, Voltage=50V, Author="CERN DEM JLC", Component Type=Standard, CreateDate=03.12.2007, HelpURL=\\cern.ch\dfs\Applications\Altium\Datasheets\CC0402_NP0_PHYCOMP.pdf, LatestRevisionDate=03.12.2007, Manufacturer Part Number=CC0402_15PF_50V_5%_NP0, Mounted=Yes, Part Description="SMD Multilayer Chip Ceramic Capacitor", Part Number=CC0402_15PF_50V_5%_NP0, Pin Count=2, SMD=Yes, Socket=No, Status="Not Recommended", TC=NP0
C29 C35 C36: library part CC0402_22NF_16V_10%_X7R, "Non-polarised capacitor", Case=0402, Manufacturer=GENERIC, Manufacturer1 ComponentHeight=0.55mm, Manufacturer1 Example=PHYCOMP, Manufacturer1 Part Number=223878715641, Tolerance=±10%, Voltage=16V, Author="CERN DEM JLC", Component Type=Standard, CreateDate=03.12.2007, HelpURL=\\cern.ch\dfs\Applications\Altium\Datasheets\CC0402_X7R_PHYCOMP.pdf, LatestRevisionDate=03.12.2007, Manufacturer Part Number=CC0402_22NF_16V_10%_X7R, Mounted=Yes, Part Description="SMD Multilayer Chip Ceramic Capacitor", Part Number=CC0402_22NF_16V_10%_X7R, Pin Count=2, SMD=Yes, Socket=No, Status="Not Recommended", TC=X7R
C30 C31: library part CC0402_6.8PF_50V_0.5PF_NP0, "Non-polarised capacitor", Case=0402, Manufacturer=GENERIC, Manufacturer1 ComponentHeight=0.55mm, Manufacturer1 Example=PHYCOMP, Manufacturer1 Part Number=223886915688, Tolerance=±0.5pF, Voltage=50V, Author="CERN DEM JLC", Component Type=Standard, CreateDate=03.12.2007, HelpURL=\\cern.ch\dfs\Applications\Altium\Datasheets\CC0402_NP0_PHYCOMP.pdf, LatestRevisionDate=03.12.2007, Manufacturer Part Number=CC0402_6.8PF_50V_0.5PF_NP0, Mounted=Yes, Part Description="SMD Multilayer Chip Ceramic Capacitor", Part Number=CC0402_6.8PF_50V_0.5PF_NP0, Pin Count=2, SMD=Yes, Socket=No, Status="Not Recommended", TC=NP0
C34 C37: library part CC0603_4.7UF_10V_10%_X5R, "Non-polarised capacitor", Case=0603, Manufacturer=GENERIC, Manufacturer1 ComponentHeight=0.95mm, Manufacturer1 Example=TDK, Manufacturer1 Part Number=C1608X5R1A475K080AC, Manufacturer Part Number=CC0603_4.7uF_10V_10%_X5R, Tolerance=±10%, Voltage=10V, Author=ELMAN, Component Type=Standard, CreateDate=13.11.2016, LatestRevisionDate=13.11.2016, Mounted=Yes, Part Description="SMD Multilayer Chip Ceramic Capacitor", Part Number=CC0603_4.7UF_10V_10%_X5R, Pin Count=2, SMD=Yes, Socket=No, Status=Preferred, TC=X5R
D1 D2 D5 D8: "Diode Anode Pin 1 Cathode Pin 3 (Pas de pin 2)", Case=SOT323, Manufacturer=TOSHIBA, Power=250mW, Voltage=40V, Author=DEL, Component Type=Standard, ComponentHeight=1mm, CreateDate=6/5/2025, Device=1SS370, LatestRevisionDate=6/5/2025, Manufacturer Part Number=1SS370, Mounted=Yes, PackageDescription="SOT323, 0.65mm pitch; 3 pin, 1.25mm W X 2.00mm L, IPC Medium Density", Part Description="High Voltage, High Speed Switching Applications", Part Number=1SS370, Pin Count=3, SMD=Yes, Socket=No
D3 D4 D6 D7: "Schottky Diode", Case=SOD-123, Manufacturer="ON SEMICONDUCTOR", Power=500mA, Voltage=40V, Author="CERN DEM JLC", Component Type=Standard, ComponentHeight=1.35mm, CreateDate=4/11/2011, Device=MBR0540T1G, HelpURL=\\cern.ch\dfs\Applications\Altium\Datasheets\MBR0540T1G.pdf, LatestRevisionDate=4/11/2011, Manufacturer Part Number=MBR0540T1G, Mounted=Yes, PackageDescription="Diode (SOD-123), 2.70mm W X 1.60mm L X 1.35mm H body, IPC Medium Density", Part Description="Schottky Power Rectifier", Part Number=MBR0540T1G, Pin Count=2, SMD=Yes, Socket=No
D9: "Diode  Schottky Anode pin 1 and 2 cathode pin 3", Case=DFN, Manufacturer=DIODES, Power=15A, Voltage=100V, Author=DEL, Component Type=Standard, ComponentHeight=1.15mm, CreateDate=6/24/2022, Device=SBRT15U100SP5, LatestRevisionDate=6/24/2022, Manufacturer Part Number=SBRT15U100SP5, Mounted=Yes, PackageDescription="DFN, 3-Leads, Body 4.05x6.6mm", Part Description="Schottky Rectifier", Part Number=SBRT15U100SP5, Pin Count=3, SMD=Yes, Socket=No
D10: "Diode", Case=SOD-123, Manufacturer="VISHAY SEMICONDUCTORS", Manufacturer Part Number=1N4148W-E3-08, Power=150mA, Voltage=75V, Author=DEL, Component Type=Standard, ComponentHeight=1.45mm, CreateDate=1/27/2018, Device=1N4148W, LatestRevisionDate=1/27/2018, Mounted=Yes, PackageDescription="SOD Diode (SOD-123); 2.70mm W X 1.55mm L X 1.45mm H body, IPC Medium Density", Part Description="Small Signal Diode", Part Number=1N4148W, Pin Count=2, SMD=Yes, Socket=No
J1 J2 J3: library part 3M_2304-6111-TG, "Connector 4 Male", Manufacturer=3M, Author=DEL, Component Type=Standard, ComponentHeight=8.4mm, CreateDate=2018-09-13, Family="Header 4", LatestRevisionDate=2018-09-13, Manufacturer Part Number=3M_2304-6111-TG, Mounted=DNP, Part Description="4 Contacts - Vertival Contacts Straight Strip Header Pitch 2.54", Part Number=3M_2304-6111-TG, Pin Count=4, SMD=No, Socket=No, Status=None
J4 J7: library part 3M_2302-6111-TG, "Connector 2 Male", Manufacturer=3M, Author=DEL, Component Type=Standard, ComponentHeight=8.4mm, CreateDate=2018-09-13, Family="Header 2", LatestRevisionDate=2018-09-13, Manufacturer Part Number=3M_2302-6111-TG, Part Description="2 Contacts - Horizontal Contacts Straight Strip Header Pitch 2.54", Part Number=3M_2302-6111-TG, Pin Count=2, SMD=No, Socket=No, Status=None
  J4: Mounted=DNP
  J7: Mounted=Yes
J5 J6: library part 3M_955114-6102-AR, "Connector 14 Female", Manufacturer=3M, Manufacturer Part Number=955114-6102-AR, Author=DEL, ComponentHeight=4.3mm, Component Type=Standard, CreateDate=02.11.2017, Family="Socket 14", LatestRevisionDate=02.11.2017, Mounted=Yes, Part Description="14 Contacts - 2mm x 2 mm Straight, Boardmount Socket, 950 Serie", Part Number=3M_955114-6102-AR, Pin Count=14, SMD=No, Socket=No, Status=None
J8: library part MOLEX_22-03-5045, "Connector 4 Male", Manufacturer=MOLEX, Manufacturer Part Number=22-27-2041, Author=DEL, ComponentHeight=5.9mm, Component Type=Standard, CreateDate=21.10.2017, Family=SPOX, LatestRevisionDate=21.10.2017, Mounted=Yes, Part Description="2.50mm Pitch SPOX Wire-to-Board Header, Vertical, Shrouded, 4 Circuits, Tin (Sn) Plating", Part Number=MOLEX_22-03-5045, Pin Count=4, SMD=No, Socket=No, Status=None
L1: library part XFMR_TDK_ATB322515-0110-T000, "Inductor Common Mode", Manufacturer=TDK, Manufacturer Part Number=ATB322515-0110-T000, Author=DEL, Component Type=Standard, ComponentHeight=1.55mm, CreateDate=6/4/2025, LatestRevisionDate=6/4/2025, Mounted=Yes, Part Description="1:10 Step-up Transformers", Part Number=XFMR_TDK_ATB322515-0110-T000, Pin Count=16, SMD=Yes, Socket=No, Status=None
L2: library part IND_2.2UH_20%_VISHAY_IHLP2525CZER2R2M01, "Inductor With Magnetic core", Manufacturer=FERROCORE, Manufacturer Part Number=HPI0630-150, Part Number=IND_15UH_20%_HPI0630, Power=2.7A, Resistance=0.11R, Tolerance=±20%, Author=DEL, Component Type=Standard, ComponentHeight=3mm, CreateDate=11/14/2017, LatestRevisionDate=11/14/2017, Mounted=Yes, Part Description="SMT Inductors SIMID Series", Pin Count=2, SMD=Yes, Socket=No, Status=Preferred
L3: library part IND_1UH_20%_COILCRAFT_XAL4020-102ME, "Inductor", Manufacturer=COILCRAFT, Manufacturer Part Number=XAL4020-102ME, Power=9.6A, Resistance=0.014R, Tolerance=±20%, Author=ROMAN, Component Type=Standard, ComponentHeight=2.1mm, CreateDate=6/30/2016, LatestRevisionDate=6/30/2016, Mounted=Yes, Part Description="Shielded SMD Power Inductors", Part Number=IND_1UH_20%_COILCRAFT_XAL4020-102ME, Pin Count=2, SMD=Yes, Socket=No, Status=None
L4: library part IND_2.2UH_20%_TDK_VLS3010CX-2R2M-1, "Inductor With Magnetic core", Manufacturer=TDK, Manufacturer Part Number=VLS3010CX-2R2M-1, Power=1.11A, Resistance=0.065R, Tolerance=±20%, Author=DEL, Component Type=Standard, ComponentHeight=1mm, CreateDate=1/23/2022, LatestRevisionDate=1/23/2022, Mounted=Yes, Part Description="SMT Power Inductors", Part Number=IND_2.2UH_20%_TDK_VLS3010CX-2R2M-1, Pin Count=2, SMD=Yes, Socket=No, Status=None
L5: library part IND1008_2.2UH_20%_TDK_MLP2520S2R2MT0S1, "Inductor", Case=1008, Manufacturer=TDK, Manufacturer Part Number=MLP2520S2R2MT0S1, Power=1.2A, Resistance=0.117R, Tolerance=±20%, Author=ELMAN, ComponentHeight=1mm, Component Type=Standard, CreateDate=02.02.2016, HelpURL=C:\eftek\library\doc\DS_SPICE\capacitors\TDK\inductor_commercial_power_mlp2520_en.pdf, LatestRevisionDate=02.02.2016, Mounted=Yes, Part Description="SMT Inductors", Part Number=IND1008_2.2UH_20%_TDK_MLP2520S2R2MT0S1, Pin Count=2, SMD=Yes, Socket=No, Status=None
LD1: library part LED_OF-SMD1608B, "LED 1C 2A", Case=0603, Manufacturer=OPTOFLASH, Manufacturer Part Number=OF-SMD1608B, Author=DEL, Color=Blue, ComponentHeight=0.8mm, Component Type=Standard, CreateDate=11.12.2017, LatestRevisionDate=11.12.2017, Mounted=Yes, PackageDescription="Chip Blue LED, 2-Leads, Body 1.6x0.8mm, IPC Medium Density", Part Description="Surface Mount Red LED (0603 Case)", Part Number=LED_OF-SMD1608B, Pin Count=2, SMD=Yes, Socket=No
LD2: library part LED_OF-SMD1608Y, "LED 1C 2A", Case=0603, Manufacturer=OPTOFLASH, Manufacturer Part Number=OF-SMD1608R, Author=DEL, Color=Yellow, ComponentHeight=0.8mm, Component Type=Standard, CreateDate=11.12.2017, LatestRevisionDate=11.12.2017, Mounted=Yes, PackageDescription="Chip Yellow LED, 2-Leads, Body 1.6x0.8mm, IPC Medium Density", Part Description="Surface Mount Red LED (0603 Case)", Part Number=LED_OF-SMD1608Y, Pin Count=2, SMD=Yes, Socket=No
LD3: library part LED_OF-SMD1608G, "LED 1C 2A", Case=0603, Manufacturer=OPTOFLASH, Manufacturer Part Number=OF-SMD1608G, Author=ELMAN, Color=Green, ComponentHeight=0.8mm, Component Type=Standard, CreateDate=27.08.2015, LatestRevisionDate=27.08.2015, Mounted=Yes, PackageDescription="Chip Green LED, 2-Leads, Body 1.6x0.8mm, IPC Medium Density", Part Description="Surface Mount Green LED (0603 Case)", Part Number=LED_OF-SMD1608G, Pin Count=2, SMD=Yes, Socket=No
LS1: library part HPS13C, "Piezo Sounder", Manufacturer="JL WORLD", Author=DEL, ComponentHeight=1.2mm, Component Type=Standard, CreateDate=10.11.2017, Family=Piezo, LatestRevisionDate=10.11.2017, Manufacturer Part Number=HPS13C, Mounted=Yes, Output=">= 80 dB", PackageDescription="12.8 x 12.8 x 2.5 mm", Part Description="Piezo sound generator", Part Number=HPS13C, Pin Count=2, SMD=Yes, Socket=No
PB1 PB2 PB3 PB4: library part PB_E-SWITCH_TL1105HF100Q, "Push-Button Switch SPDT", Manufacturer=E-SWITCH, Manufacturer Part Number=TL3305AF260QG, Author=DEL, ComponentHeight=3.8mm, Component Type=Standard, CreateDate=06.11.2017, Family="Push Button", LatestRevisionDate=07.11.2017, Mounted=Yes, PackageDescription="6mm x 6mm Body, Surface Mount Tactile Switches", Part Description="12VDC 50mA SPST Tactile  Push-Button Switch", Part Number=PB_E-SWITCH_TL1105HF100Q, Pin Count=4, SMD=Yes, Socket=No, Status=None
Q1: "N-CHANNEL MOSFET WITH DIODE", Case=SOT23-3, Manufacturer="INTERNATIONAL RECTIFIER", Author="CERN DEM JLC", Component Type=Standard, ComponentHeight=1.12mm, CreateDate=10/6/2011, Device=IRLML0100TRPBF, HelpURL=\\cern.ch\dfs\Applications\Altium\Datasheets\IRLML0100TRPBF.pdf, LatestRevisionDate=10/6/2011, Manufacturer Part Number=IRLML0100TRPBF, Mounted=Yes, PackageDescription="SOT, 0.95mm, pitch; 3 pin,1.30mm W X 2.92mm L X 1.12mm H body, IPC Medium Density", Part Description="100V 1.6A N-Channel HEXFET® Power MOSFET", Part Number=IRLML0100TRPBF, Pin Count=3, SMD=Yes, Socket=No
Q2: "PNP Transistor", Case=SOT23-3, Manufacturer="NXP SEMICONDUCTORS", Author="CERN DEM JLC", Component Type=Standard, ComponentHeight=1.1mm, CreateDate=6/14/2011, Device=BC857B, HelpURL=\\cern.ch\dfs\Applications\Altium\Datasheets\BC857B.pdf, LatestRevisionDate=6/14/2011, Manufacturer Part Number=BC857B, Mounted=Yes, PackageDescription="SOT23, 3 pin, Pitch 0.95mm - 1.3mm W X 2.9mm L X 1.1mm H, IPC Medium Density", Part Description="45V, 100mA PNP general-purpose transistors", Part Number=BC857B, Pin Count=3, SMD=Yes, Socket=No
Q3: "P-CHANNEL MOSFET WITH DIODE", Case=SOT23-3, Manufacturer="INTERNATIONAL RECTIFIER", Author="CERN DEM JLC", Component Type=Standard, ComponentHeight=1.12mm, CreateDate=8/29/2011, Device=IRLML6401PBF, HelpURL=\\cern.ch\dfs\Applications\Altium\Datasheets\IRLML6402PBF.pdf, LatestRevisionDate=8/29/2011, Manufacturer Part Number=IRLML6401PBF, Mounted=Yes, PackageDescription="SOT, 0.95mm, pitch; 3 pin,1.30mm W X 2.92mm L X 1.12mm H body, IPC Medium Density", Part Description="-12V -4.3A P-Channel HEXFET® Power MOSFET", Part Number=IRLML6401PBF, Pin Count=3, SMD=Yes, Socket=No
R1 R7 R17 R18 R31: library part R0402_100K_1%_0.0625W_100PPM, "Resistor - 1%", Case=0402, Manufacturer=GENERIC, Manufacturer1 ComponentHeight=0.4mm, Manufacturer1 Example=PHYCOMP, Manufacturer1 Part Number=232270671004, Power=0.0625W, Tolerance=±1%, Author="CERN DEM JLC", Component Type=Standard, CreateDate=12/3/2007, HelpURL=\\cern.ch\dfs\Applications\Altium\Datasheets\R0402_Phycomp_RC0402.pdf, LatestRevisionDate=3/13/2008, Manufacturer Part Number=R0402_100K_1%_0.0625W_100PPM, Mounted=Yes, Part Description="General Purpose Thick Film Chip Resistor", Part Number=R0402_100K_1%_0.0625W_100PPM, Pin Count=2, SMD=Yes, Socket=No, Status="Not recommended", TC=±100ppm/°C
R2 R3 R8 R22: library part R0402_100R_1%_0.0625W_100PPM, "Resistor - 1%", Case=0402, Manufacturer=GENERIC, Manufacturer1 ComponentHeight=0.4mm, Manufacturer1 Example=PHYCOMP, Manufacturer1 Part Number=232270671001, Power=0.0625W, Tolerance=±1%, Author="CERN DEM JLC", Component Type=Standard, CreateDate=03.12.2007, HelpURL=\\cern.ch\dfs\Applications\Altium\Datasheets\R0402_Phycomp_RC0402.pdf, LatestRevisionDate=13.03.2008, Manufacturer Part Number=R0402_100R_1%_0.0625W_100PPM, Mounted=Yes, Part Description="General Purpose Thick Film Chip Resistor", Part Number=R0402_100R_1%_0.0625W_100PPM, Pin Count=2, SMD=Yes, Socket=No, Status="Not recommended", TC=±100ppm/°C
R4 R15: library part R0402_1K_1%_0.0625W_100PPM, "Resistor - 1%", Case=0402, Manufacturer=GENERIC, Manufacturer1 ComponentHeight=0.4mm, Manufacturer1 Example=PHYCOMP, Manufacturer1 Part Number=232270671002, Power=0.0625W, Tolerance=±1%, Author="CERN DEM JLC", Component Type=Standard, CreateDate=03.12.2007, HelpURL=\\cern.ch\dfs\Applications\Altium\Datasheets\R0402_Phycomp_RC0402.pdf, LatestRevisionDate=13.03.2008, Manufacturer Part Number=R0402_1K_1%_0.0625W_100PPM, Mounted=Yes, Part Description="General Purpose Thick Film Chip Resistor", Part Number=R0402_1K_1%_0.0625W_100PPM, Pin Count=2, SMD=Yes, Socket=No, Status="Not recommended", TC=±100ppm/°C
R5: library part R0805_0R_JUMPER, "Resistor - 1%", Case=0805, Manufacturer=GENERIC, Manufacturer1 ComponentHeight=0.6mm, Manufacturer1 Example="NIC COMPONENT", Manufacturer1 Part Number=NRC10Z0, Author="CERN DEM JLC", Component Type=Standard, CreateDate=12/3/2007, HelpURL=\\cern.ch\dfs\Applications\Altium\Datasheets\R0805_NIC_NRC.pdf, LatestRevisionDate=3/13/2008, Manufacturer Part Number=R0805_0R_JUMPER, Mounted=Yes, Part Description="2A (0.05R Max DC Resistance) Zero Ohm Jumper", Part Number=R0805_0R_JUMPER, Pin Count=2, SMD=Yes, Socket=No, Status=Preferred
R6: library part R0805_100K_1%_0.125W_100PPM, "Resistor - 1%", Case=0805, Manufacturer=GENERIC, Manufacturer1 ComponentHeight=0.6mm, Manufacturer1 Example="NIC COMPONENT", Manufacturer1 Part Number=NRC10F1003TRF, Power=0.125W, Tolerance=±1%, Author="CERN DEM JLC", Component Type=Standard, CreateDate=12/3/2007, HelpURL=\\cern.ch\dfs\Applications\Altium\Datasheets\R0805_NIC_NRC.pdf, LatestRevisionDate=3/13/2008, Manufacturer Part Number=R0805_100K_1%_0.125W_100PPM, Mounted=Yes, Part Description="General Purpose Thick Film Chip Resistor", Part Number=R0805_100K_1%_0.125W_100PPM, Pin Count=2, SMD=Yes, Socket=No, Status=Preferred, TC=±100ppm/°C
R9: library part R0402_7K5_1%_0.0625W_100PPM, "Resistor - 1%", Case=0402, Manufacturer=GENERIC, Manufacturer1 ComponentHeight=0.4mm, Manufacturer1 Example=PHYCOMP, Manufacturer1 Part Number=232270677502, Power=0.0625W, Tolerance=±1%, Author="CERN DEM JLC", Component Type=Standard, CreateDate=12/3/2007, HelpURL=\\cern.ch\dfs\Applications\Altium\Datasheets\R0402_Phycomp_RC0402.pdf, LatestRevisionDate=3/13/2008, Manufacturer Part Number=R0402_7K5_1%_0.0625W_100PPM, Mounted=Yes, Part Description="General Purpose Thick Film Chip Resistor", Part Number=R0402_7K5_1%_0.0625W_100PPM, Pin Count=2, SMD=Yes, Socket=No, Status="Not recommended", TC=±100ppm/°C
R10: library part R0402_1M_1%_0.0625W_100PPM, "Resistor - 1%", Case=0402, Manufacturer=GENERIC, Manufacturer1 ComponentHeight=0.4mm, Manufacturer1 Example=PHYCOMP, Manufacturer1 Part Number=232270671005, Power=0.0625W, Tolerance=±1%, Author="CERN DEM JLC", Component Type=Standard, CreateDate=12/3/2007, HelpURL=\\cern.ch\dfs\Applications\Altium\Datasheets\R0402_Phycomp_RC0402.pdf, LatestRevisionDate=3/13/2008, Manufacturer Part Number=R0402_1M_1%_0.0625W_100PPM, Mounted=Yes, Part Description="General Purpose Thick Film Chip Resistor", Part Number=R0402_1M_1%_0.0625W_100PPM, Pin Count=2, SMD=Yes, Socket=No, Status="Not recommended", TC=±100ppm/°C
R11 R32: library part R0402_12K_1%_0.0625W_100PPM, "Resistor - 1%", Case=0402, Manufacturer=GENERIC, Manufacturer1 ComponentHeight=0.4mm, Manufacturer1 Example=PHYCOMP, Manufacturer1 Part Number=232270671203, Power=0.0625W, Tolerance=±1%, Author="CERN DEM JLC", Component Type=Standard, CreateDate=03.12.2007, HelpURL=\\cern.ch\dfs\Applications\Altium\Datasheets\R0402_Phycomp_RC0402.pdf, LatestRevisionDate=13.03.2008, Manufacturer Part Number=R0402_12K_1%_0.0625W_100PPM, Mounted=Yes, Part Description="General Purpose Thick Film Chip Resistor", Part Number=R0402_12K_1%_0.0625W_100PPM, Pin Count=2, SMD=Yes, Socket=No, Status="Not recommended", TC=±100ppm/°C
R12: library part R0402_680R_1%_0.0625W_100PPM, "Resistor - 1%", Case=0402, Manufacturer=GENERIC, Manufacturer1 ComponentHeight=0.4mm, Manufacturer1 Example=PHYCOMP, Manufacturer1 Part Number=232270676801, Power=0.0625W, Tolerance=±1%, Author="CERN DEM JLC", Component Type=Standard, CreateDate=12/3/2007, HelpURL=\\cern.ch\dfs\Applications\Altium\Datasheets\R0402_Phycomp_RC0402.pdf, LatestRevisionDate=3/13/2008, Manufacturer Part Number=R0402_680R_1%_0.0625W_100PPM, Mounted=Yes, Part Description="General Purpose Thick Film Chip Resistor", Part Number=R0402_680R_1%_0.0625W_100PPM, Pin Count=2, SMD=Yes, Socket=No, Status="Not recommended", TC=±100ppm/°C
R13: library part R0402_270K_1%_0.0625W_100PPM, "Resistor - 1%", Case=0402, Manufacturer=GENERIC, Manufacturer1 ComponentHeight=0.4mm, Manufacturer1 Example=PHYCOMP, Manufacturer1 Part Number=232270672704, Power=0.0625W, Tolerance=±1%, Author="CERN DEM JLC", Component Type=Standard, CreateDate=12/3/2007, HelpURL=\\cern.ch\dfs\Applications\Altium\Datasheets\R0402_Phycomp_RC0402.pdf, LatestRevisionDate=3/13/2008, Manufacturer Part Number=R0402_270K_1%_0.0625W_100PPM, Mounted=Yes, Part Description="General Purpose Thick Film Chip Resistor", Part Number=R0402_270K_1%_0.0625W_100PPM, Pin Count=2, SMD=Yes, Socket=No, Status="Not recommended", TC=±100ppm/°C
R14 R38: library part R0402_270R_1%_0.0625W_100PPM, "Resistor - 1%", Case=0402, Manufacturer=GENERIC, Manufacturer1 ComponentHeight=0.4mm, Manufacturer1 Example=PHYCOMP, Manufacturer1 Part Number=232270672701, Power=0.0625W, Tolerance=±1%, Author="CERN DEM JLC", Component Type=Standard, CreateDate=2007-12-03, HelpURL=\\cern.ch\dfs\Applications\Altium\Datasheets\R0402_Phycomp_RC0402.pdf, LatestRevisionDate=2008-03-13, Manufacturer Part Number=R0402_270R_1%_0.0625W_100PPM, Mounted=Yes, Part Description="General Purpose Thick Film Chip Resistor", Part Number=R0402_270R_1%_0.0625W_100PPM, Pin Count=2, SMD=Yes, Socket=No, Status="Not recommended", TC=±100ppm/°C